# Altium PCB Button_Board_PCB.PcbDoc
Units mil, origin at the board's own origin, x right, y up, seen from the top; angles counter-clockwise.
Board outline 1250 x 750 mil, 2 copper layers (Top Layer, Bottom Layer); 3 components, 3 nets, 10 pads, 1 vias.
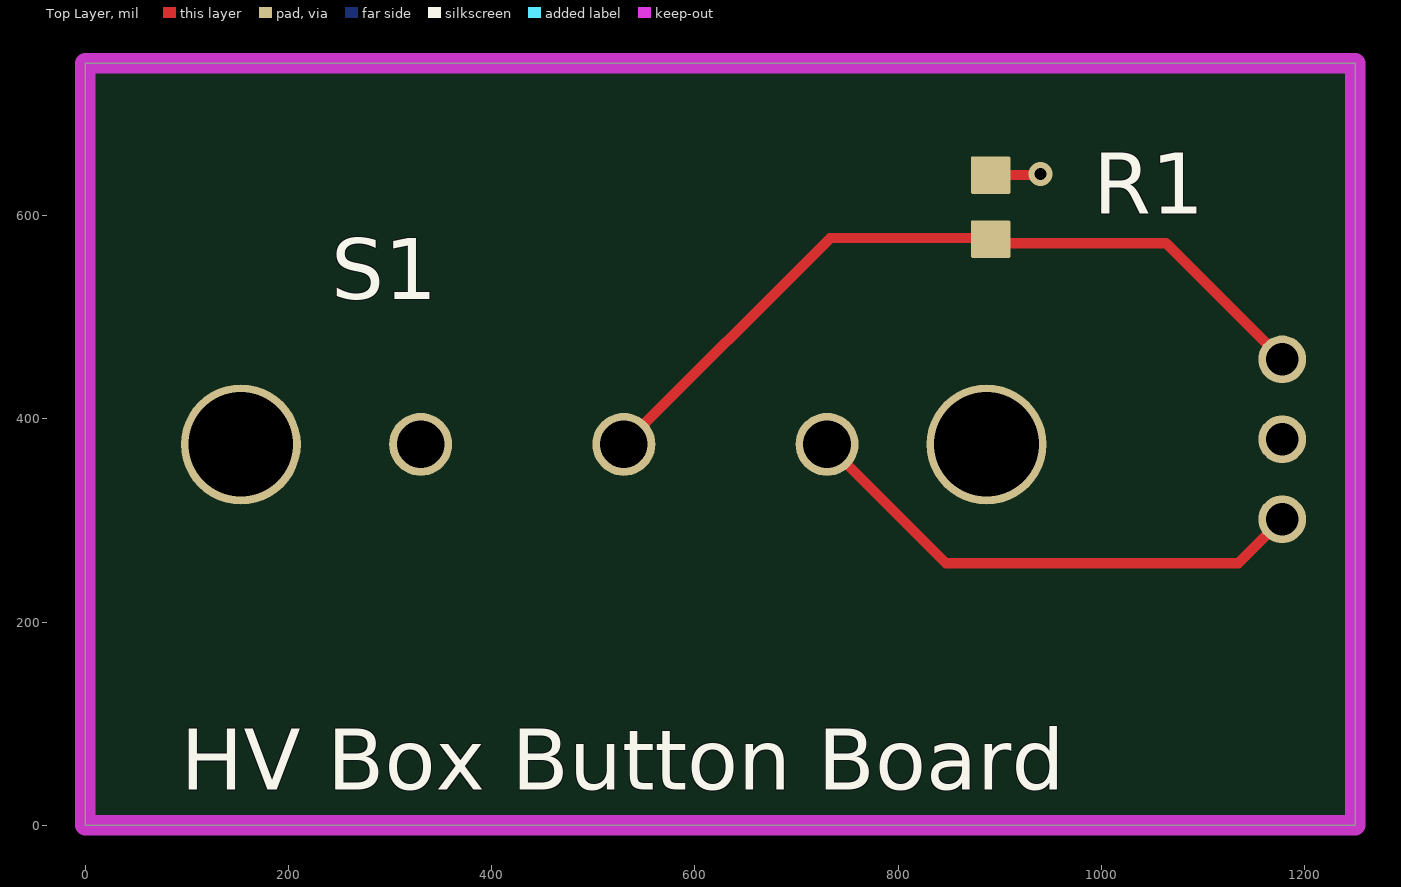
[diagram p0: Top Layer view]
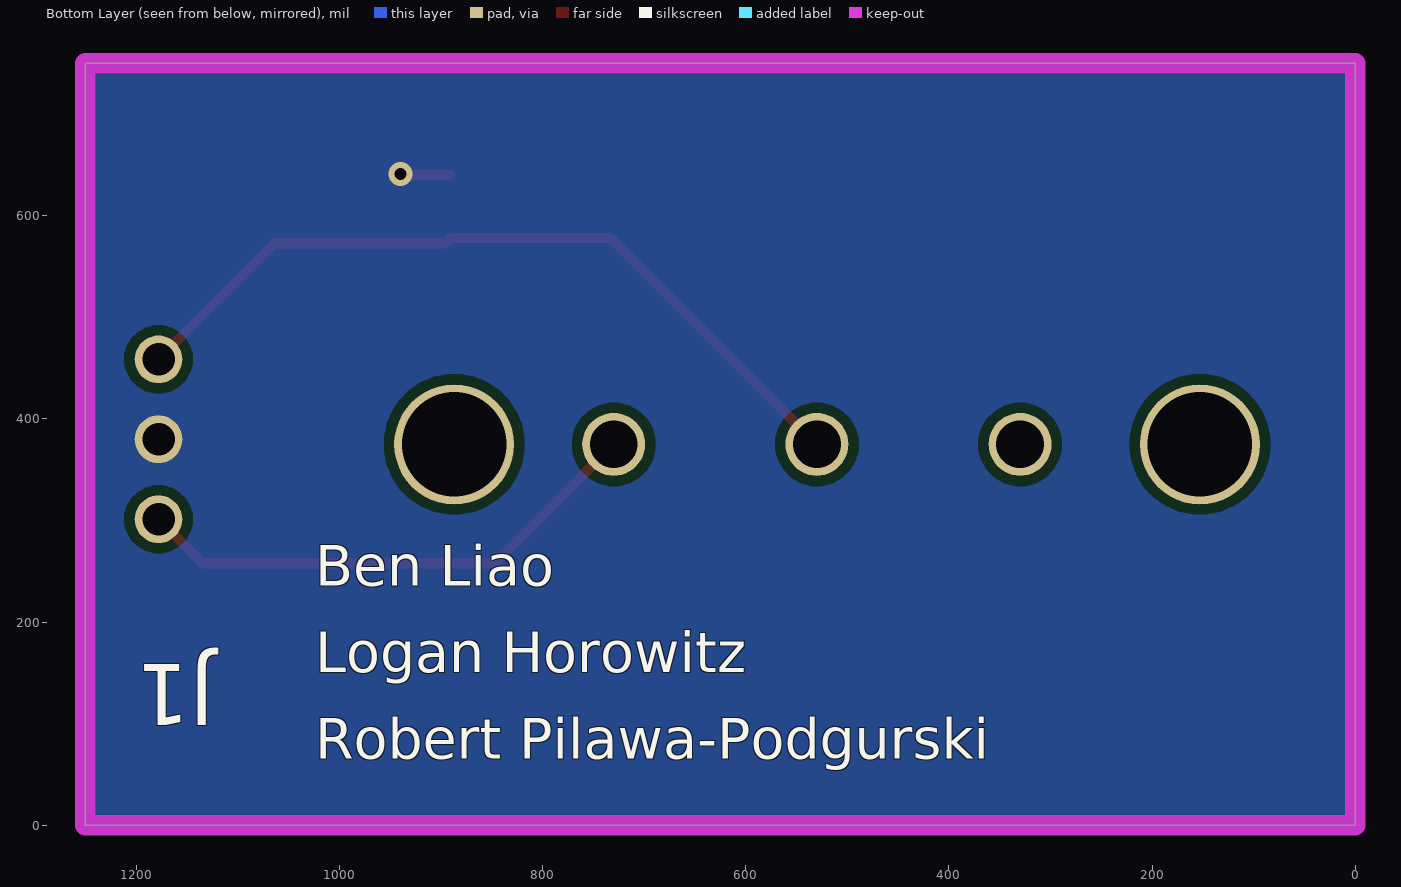
[diagram p1: Bottom Layer view, seen from below]

## Layer stack, top to bottom
Top Solder: solder mask 0.4, Solder Resist, Dk 3.5
Top Layer: signal copper 1.4
Dielectric 1: dielectric 12.6, FR-4, Dk 4.8
Bottom Layer: signal copper 1.4
Bottom Solder: solder mask 0.4, Solder Resist, Dk 3.5

## Board outline
0,0 1250,0 1250,750 0,750

## Design rules (kind name [scope] priority, off if disabled: settings)
BoardOutlineClearance [All] p1: gap=9.84 ignorepadtopadclearanceinfootprint=FALSE
Clearance Clearance_Edge [OnLayer('Keep-Out Layer')] p1: gap=0 ignorepadtopadclearanceinfootprint=FALSE
Clearance Clearance_SW [InNet('SW')] p2: gap=15.75 ignorepadtopadclearanceinfootprint=FALSE except(0: Arc-Hole Track-Hole SMDPad-Hole THPad-Hole Via-Hole Fill-Hole Poly-Hole Region-Hole Text-Hole; 5: Arc-Arc Arc-Track Track-Track; 5.98: Arc-SMDPad Track-SMDPad SMDPad-SMDPad; 7.87: Via-Via; 10: Arc-THPad Arc-Via Arc-Text Track-THPad Track-Via Track-Text SMDPad-THPad SMDPad-Via SMDPad-Text THPad-THPad THPad-Via THPad-Text Via-Text Fill-Text Poly-Text Region-Text Text-Text)
Clearance [All] p3: gap=10 ignorepadtopadclearanceinfootprint=FALSE except(0: Arc-Hole Track-Hole SMDPad-Hole THPad-Hole Via-Hole Fill-Hole Poly-Hole Region-Hole Text-Hole; 5: Arc-Arc Arc-Track Arc-SMDPad Track-Track Track-SMDPad SMDPad-SMDPad; 5.98: SMDPad-Fill SMDPad-Poly SMDPad-Region; 7.87: Via-Via)
ComponentClearance [All] p1: gap=3.94 collisioncheckmode=3 verticalgap=3.94 showdistances=FALSE
HoleSize [All] p1: absolutevalues=TRUE maxlimit=248.03 minlimit=7.87 maxpercent=80.000 minpercent=20.000
HoleToHoleClearance [All] p1: gap=19.68 allowstackedmicrovias=TRUE
MinimumAnnularRing [All] p1: minimumring=5.12
MinimumSolderMaskSliver [All] p1 off: minsoldermaskwidth=7.87
PolygonConnect [All] p1: connectstyle=Direct reliefconductorwidth=39.37 reliefentries=4 polygonreliefangle="90 Angle" airgapwidth=9.84
RoutingVias [All] p1: holewidth=11.81 width=23.62 viastyle="Through Hole" minholewidth=11.81 minwidth=23.62 maxholewidth=248.03 maxwidth=393.7
SilkToSilkClearance [All] p1 off: silktosilkclearance=10
SilkToSolderMaskClearance [IsPad] p1 off: minsilkscreentomaskgap=10 clearancetoexposedcopper=TRUE
SolderMaskExpansion [All] p1: expansion=4 istentingtop=FALSE
Width [All] p1: maxlimit=393.7 minlimit=5 preferedwidth=5.91
24 further rules are at their usual default settings.

## Components (designator, comment, footprint, x,y, rotation, side; value= is the part's Value field where it differs from the comment)
J1 "JST3" JST_3 1178,301.3 r90 bottom
R1 "100k" 0603_RES 891,640 r270 top
S1 "S_Button" BUTTON 730,375 r180 top

## Footprints (in the part's own frame and the unit in brackets; to place one, negate y for a bottom-side part, rotate by r counter-clockwise, add the part's x,y. Pads: shape width x height; smd on the part's side, far side on the other; paste and mask are expansions set on the pad)
0603_RES [mil] "SMD 0603 Resistor Footprint"
  rrect10% 37x39 smd: 1(0,0) 2(63,0)
  body extent 0,-16 63,16, height 18
BUTTON [mil] "Button Lever Sensor Footprint"
  round 62 hole 47: 1(0,0) 2(200,0) 3(400,0)
  body extent -52,-113 498,115, height 312
JST_3 [mil] "3-pin JST Header Footprint, PH series"
  round 47 hole 32: 1(0,0) 2(78.7,0) 3(157.4,0)
  body extent -115,-10 277,256, height 197

## Part data
J1: library part J_JST_3, "Jack JST 3-pin"
R1: library part R_100kOhm_0603_1%, "Resistor 100 kOhm 0603 1%"
S1: "Switch Button"

## Free pads (board coordinates)
  round 118 hole 103: 5(153,375) 5(887,375)

## Via types
v1: diameter 23.62, hole 11.81, Top Layer to Bottom Layer, 1 vias

## Nets (pads, with @x,y where several pads share a name; then routed paths per layer and width w, separated by ;. In a path a pad name is that pad's centre, name@x,y a point inside that pad or via, vN(x,y) a via of type N, cw(c..) or ccw(c..) an arc to the next point about the centre after c; other vN are vias at no path point)
+12: J1.1 S1.1 | length 514.4
  Top Layer w10: S1.1 847,258 1134.7,258 J1.1
GND: J1.2 R1.1 | length 49.4
  Top Layer w10: R1.1 939,640 v1(940,641)
V_BTN: J1.3 R1.2 S1.2 | length 781.5
  Top Layer w10: S1.2 733,578 891,578 896,573 1063.7,573 J1.3
pads on no net: S1.3

## Polygon pours and split planes (outlines as drawn)
GND on Bottom Layer "GND_L02_P000" (solid, pour order 0): 1240,740 1240,10 10,10 10,740

## Keep-outs
Keep-Out Layer:
  the board outline again, w20

## Silkscreen, mask and mechanical layers (free items; w line width, h text height)
Top Overlay:
  text "HV Box Button Board" at 94,35 h60
Bottom Overlay:
  text "Ben Liao" at 1023.98,236 h40
  text "Logan Horowitz" at 1023.98,150.81 h40
  text "Robert Pilawa-Podgurski" at 1023.98,65.62 h40